# EAGLE board CREE_usb_LED (EAGLE 6.2)
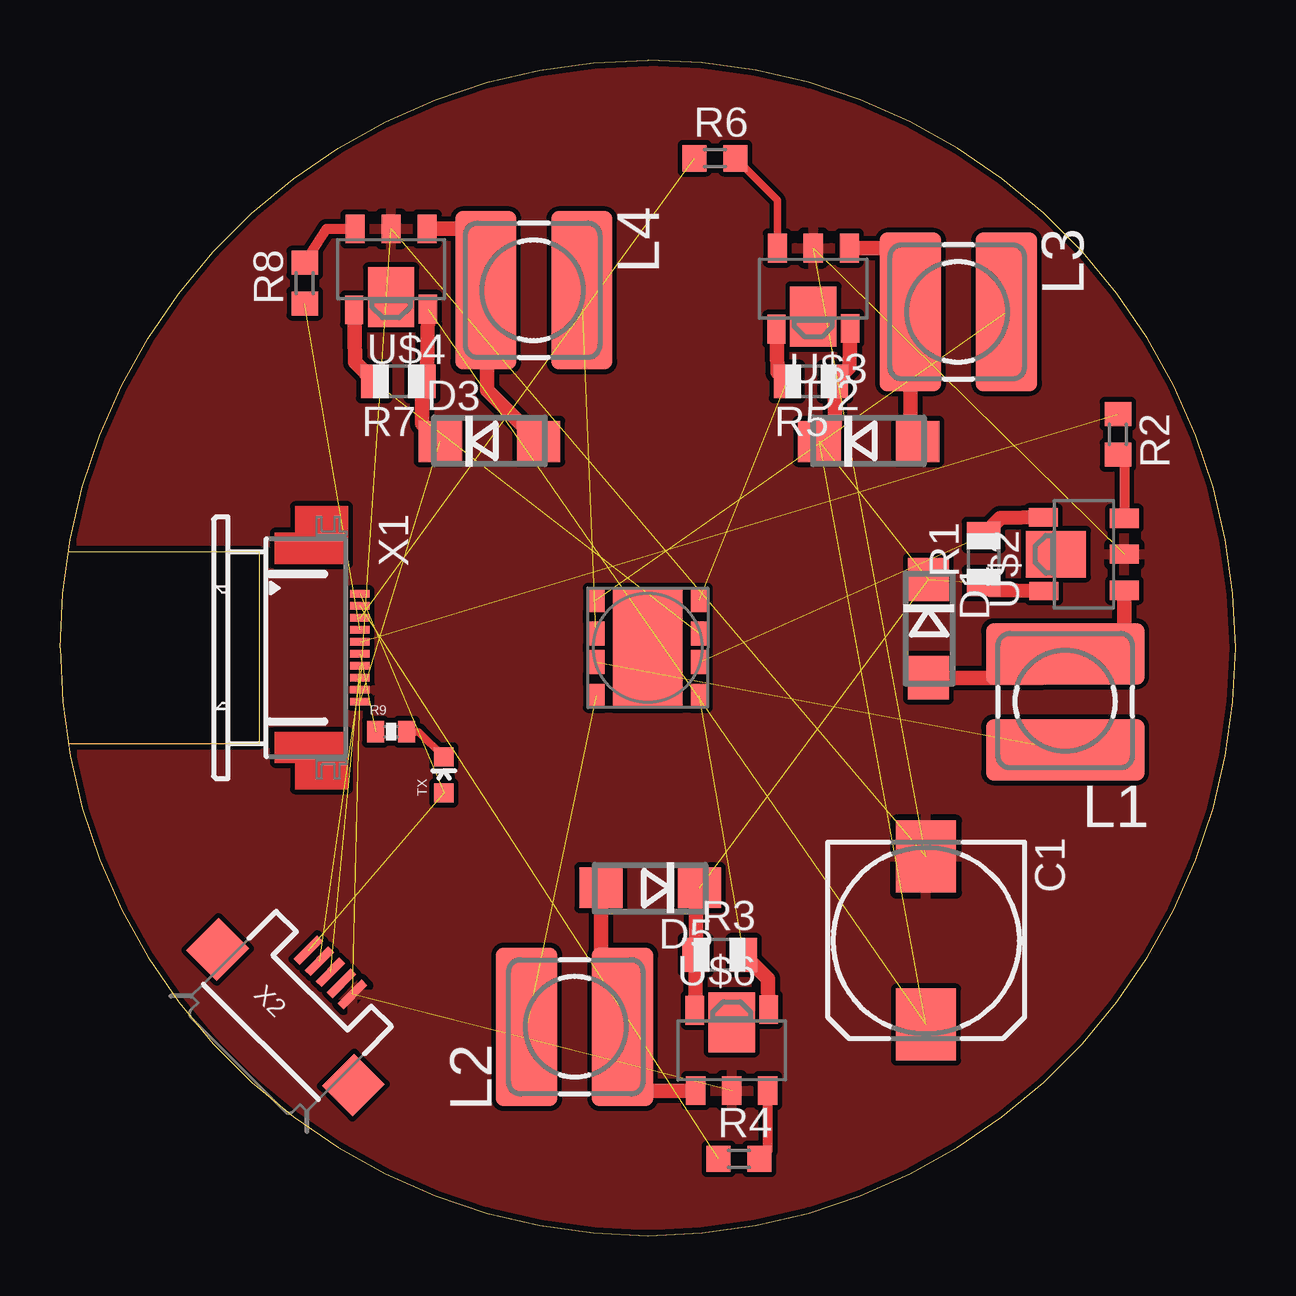
[diagram p0: board, top side]

Size 49 x 49 mm. Coordinates in mm from the lower left corner, seen from the top.
Outline: 0.34,20.5 8.3,20.5 8.3,28.5 0.34,28.5
Outline: 0,24.5 arc90 24.5,0 arc90 49,24.5 arc90 24.5,49 arc90 0,24.5
Copper layers (1*16): Top 0.035mm / dielectric 1.5mm / Bottom 0.035mm
Design rules: minimum track width 8mil, minimum drill 20mil, track to track 8mil, track to pad 8mil, pad to pad 8mil, via to via 8mil, smd to smd 8mil, copper to edge 10mil, drill to drill 8mil, minimum pad ring 12mil, minimum via ring 10mil, stop-mask expansion 4mil, vias tented up to drill 25mil, thermal gap 10mil
Net classes: 0 default: width 0.003 mm, drill 0.254 mm, clearance 0.152 mm

## Footprints (pad centres in the part's own frame; a part is rotated, then mirrored left to right if it is on the bottom)
175TMP-0810 = smd 3 x 2.5: + 3.5,0; - -3.5,0
DO214AC = smd 1.8 x 1.7: A 2.05,0; C -2.05,0
TDK6045 = smd 6.6 x 2.55: 1 0,2.05; 2 0,-1.95
R0805 = smd 1.1 x 1.4: 1 -1,0; 2 1,0
R0603 = smd 1 x 1.1: 1 -0.85,0; 2 0.85,0
0402-RES = smd 0.7 x 0.9: 1 -0.65,0; 2 0.65,0
LED-0603 = smd 0.8 x 0.8: A 0,-0.75; C 0,0.75
CREE_XLAMP_XML = smd 0.7 x 1: 1 2.15,2; 2 2.15,0.6; 3 2.15,-0.6; 4 2.15,-2; 5 -2.15,-2; 6 -2.15,-0.6; 7 -2.15,0.6; 8 -2.15,2 | smd 2.9 x 5: P$1 0,0
SOT89-5 = smd 0.8 x 1.2: 1 -1.5,-2.362; 2 0.001,-2.362; 3 1.5,-2.362 | smd 0.762 x 1.2: 4 1.538,1.016; 5 -1.538,0.991 | smd 1.93 x 2.5: THEM 0,0.488
52745-1090 = smd 0.3 x 0.8: 1 -2.25,2.5; 2 -1.75,2.5; 3 -1.25,2.5; 4 -0.75,2.5; 5 -0.25,2.5; 6 0.25,2.5; 7 0.75,2.5; 8 1.25,2.5; 9 1.75,2.5; 10 2.25,2.5
USB-MICROB = smd 0.35 x 1.4: D+ 0,2.65; D- -0.65,2.65; GND 1.3,2.65; ID 0.65,2.65; VBUS -1.3,2.65 | smd 1.8 x 1.9: MT1 -4,0; MT2 4,0

## Placement (x,y rotation side)
C1  150uF  [175TMP-0810]  36.1,12.3 270 top
D1  SCHOTTKY  [DO214AC]  36.2,25.3 270 top
D2  SCHOTTKY  [DO214AC]  33.7,33.1 0 top
D3  SCHOTTKY  [DO214AC]  17.9,33.1 0 top
D5  SCHOTTKY  [DO214AC]  24.6,14.5 180 top
L1  47uH  [TDK6045]  41.9,22.3 180 top
L2  47uH  [TDK6045]  21.5,8.7 90 top
L3  47uH  [TDK6045]  37.4,38.5 270 top
L4  47uH  [TDK6045]  19.7,39.4 270 top
R1  0.14  [R0805]  38.5,28.2 90 top
R2  10K  [R0603]  44.1,33.4 270 top
R3  0.14  [R0805]  27.5,11.7 0 top
R4  10K  [R0603]  28.3,3.2 0 top
R5  0.14  [R0805]  31.3,35.6 180 top
R6  10K  [R0603]  27.3,44.9 0 top
R7  0.14  [R0805]  14.1,35.6 180 top
R8  10K  [R0603]  10.2,39.7 90 top
R9  330  [0402-RES]  13.8,21 0 top
TX  Green  [LED-0603]  16,19.2 0 top
U$1  CREE_XLAMP_RGBW  [CREE_XLAMP_XML]  24.5,24.5 0 top
U$2  ZLED7000-LEDDRIVER  [SOT89-5]  42,28.4 90 top
U$3  ZLED7000-LEDDRIVER  [SOT89-5]  31.4,38.8 180 top
U$4  ZLED7000-LEDDRIVER  [SOT89-5]  13.8,39.6 180 top
U$6  ZLED7000-LEDDRIVER  [SOT89-5]  28,8.4 0 top
X1  52745-1090  [52745-1090]  10,24.5 270 top
X2  USB-MICROB  [USB-MICROB]  9.4,9.1 315 top

## Library data of the parts
C1 R1-R8 U$2-U$4 U$6 = adafruit
D1-D3 D5 = diode
L1-L4 = rcl
R9 TX = SparkFun
U$1 = led
X1 = con-molex; MPN: 52745-1090; OC_FARNELL: unknown; OC_NEWARK: 92M6380
X2 = SparkFun-Connectors

## Nets
D5: R6.1 X1.3
D9: R2.1 X1.5
D10: R8.1 X1.4
D13: R4.1 X1.2
D+IN: X1.7 X2.D+
D-IN: X1.8 X2.D-
GND: C1.- U$2.2 U$3.2 U$4.2 U$6.2 X1.9 X2.GND
N$1: R2.2 U$2.3
N$2: R9.2 TX.C
N$3: R1.2 U$1.3 U$2.4
N$4: L2.1 U$1.5
N$5: D1.A L1.2 U$2.1
N$6: R3.2 U$1.4 U$6.4
N$7: D5.A L2.2 U$6.1
N$8: R4.2 U$6.3
N$9: L1.1 U$1.6
N$10: R5.2 U$1.1 U$3.4
N$11: D2.A L3.2 U$3.1
N$12: R6.2 U$3.3
N$13: L4.1 U$1.7
N$14: R7.2 U$1.2 U$4.4
N$15: D3.A L4.2 U$4.1
N$16: R8.2 U$4.3
N$17: L3.1 U$1.8
TXLED: R9.1 X1.6
UVCC: TX.A X1.1 X2.VBUS
VCC: C1.+ D1.C D2.C D3.C D5.C R1.1 R3.1 R5.1 R7.1 U$2.5 U$3.5 U$4.5 U$6.5 X1.10

## Tracks (layer width: path | path; a pad name or v marks a point on that pad's centre or on a via)
D5  (1 unrouted)
D9  (1 unrouted)
D10  (1 unrouted)
D13  (1 unrouted)
D+IN  (1 unrouted)
D-IN  (1 unrouted)
GND  (6 unrouted)
  pour Top: 7,41.8 arc-90 41.8,41.8 41.8,41.7 41.9,41.7 arc-90 41.9,7.3 arc-90 6.9,7.3 arc-90 6.9,41.8
N$1
  Top 0.406: R2.2 44.36,32.29 U$2.3
N$2
  Top 0.305: TX.C 14.95,21 R9.2
N$3  (1 unrouted)
  Top 0.61: U$2.4 39.2,29.9 R1.2
N$4  (1 unrouted)
N$5
  Top 0.61: U$2.1 44.36,24.66 44.1,24.4 42.05,24.4 L1.2 40.9,23.25 D1.A
N$6  (1 unrouted)
  Top 0.61: U$6.4 29.5,10.7 R3.2
N$7
  Top 0.61: D5.A 22.55,9.6 L2.2 23.5,8.65 23.5,6.7 24.16,6.04 U$6.1
N$8
  Top 0.406: R4.2 29.5,3.55 U$6.3
N$9  (1 unrouted)
N$10  (1 unrouted)
  Top 0.61: U$3.4 29.9,36 R5.2
N$11
  Top 0.61: U$3.1 34.54,41.16 35.2,40.5 35.2,38.75 L3.2 35.45,33.4 D2.A
N$12
  Top 0.305: R6.2 29.9,43.15 U$3.3
N$13  (1 unrouted)
N$14  (1 unrouted)
  Top 0.61: U$4.4 12.3,36.4 R7.2
N$15
  Top 0.61: U$4.1 17.34,41.96 17.5,41.8 17.5,39.65 L4.2 17.75,38.75 17.8,38.7 17.8,35.25 D3.A
N$16
  Top 0.406: R8.2 11.11,41.96 U$4.3
N$17  (1 unrouted)
TXLED  (1 unrouted)
UVCC  (2 unrouted)
VCC  (6 unrouted)
  Top 0.61: U$4.5 15.3,35.8 R7.1 15.1,33.85 D3.C | U$6.5 R3.1 26.5,14.35 D5.C | U$2.5 38.8,26.9 R1.1 | U$3.5 32.9,36.2 R5.1 32.3,33.75 D2.C